# EAGLE board Slave Board (EAGLE 7.2.0)
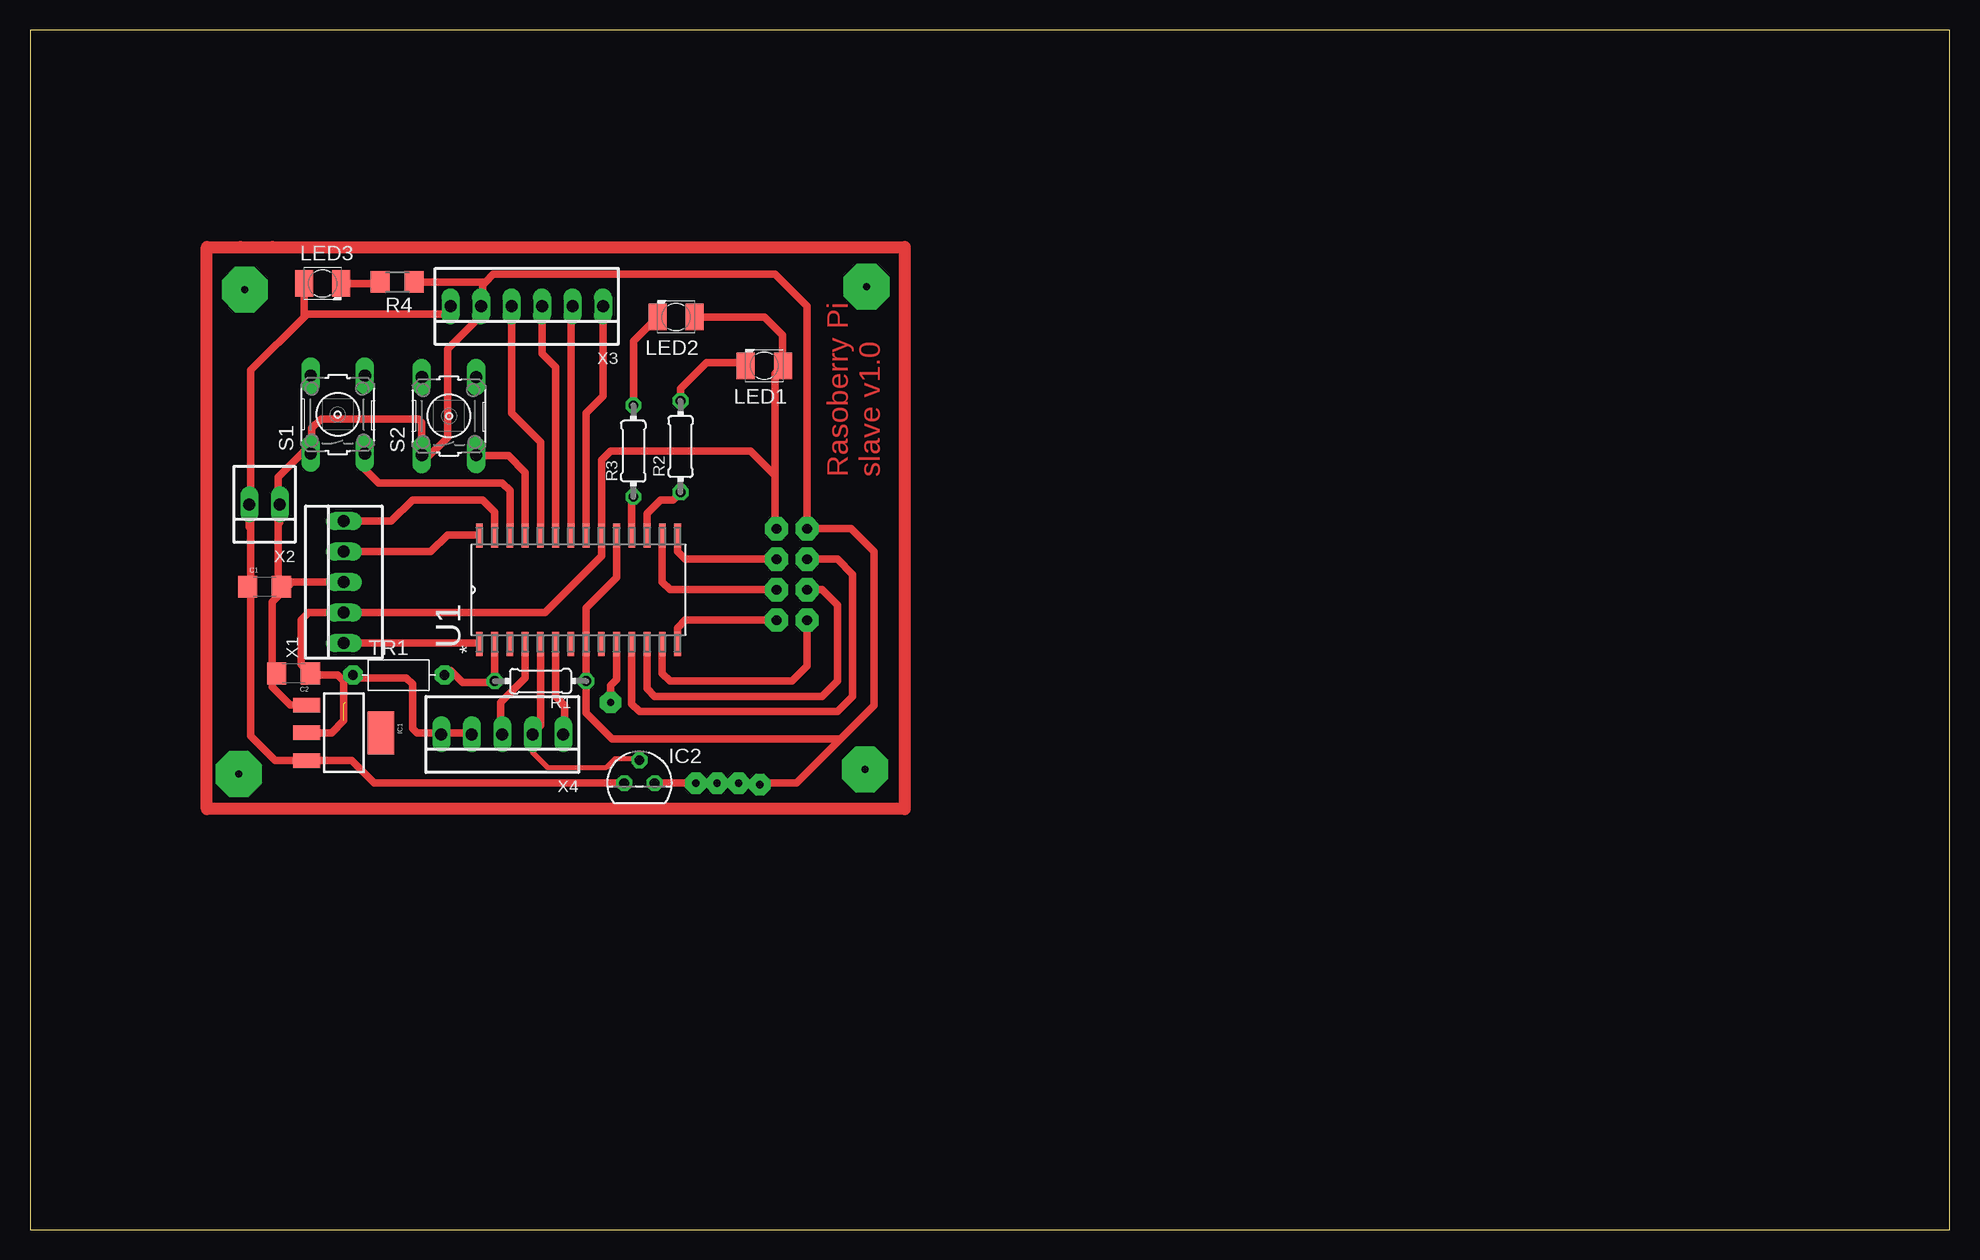
[diagram p0: board, top side]
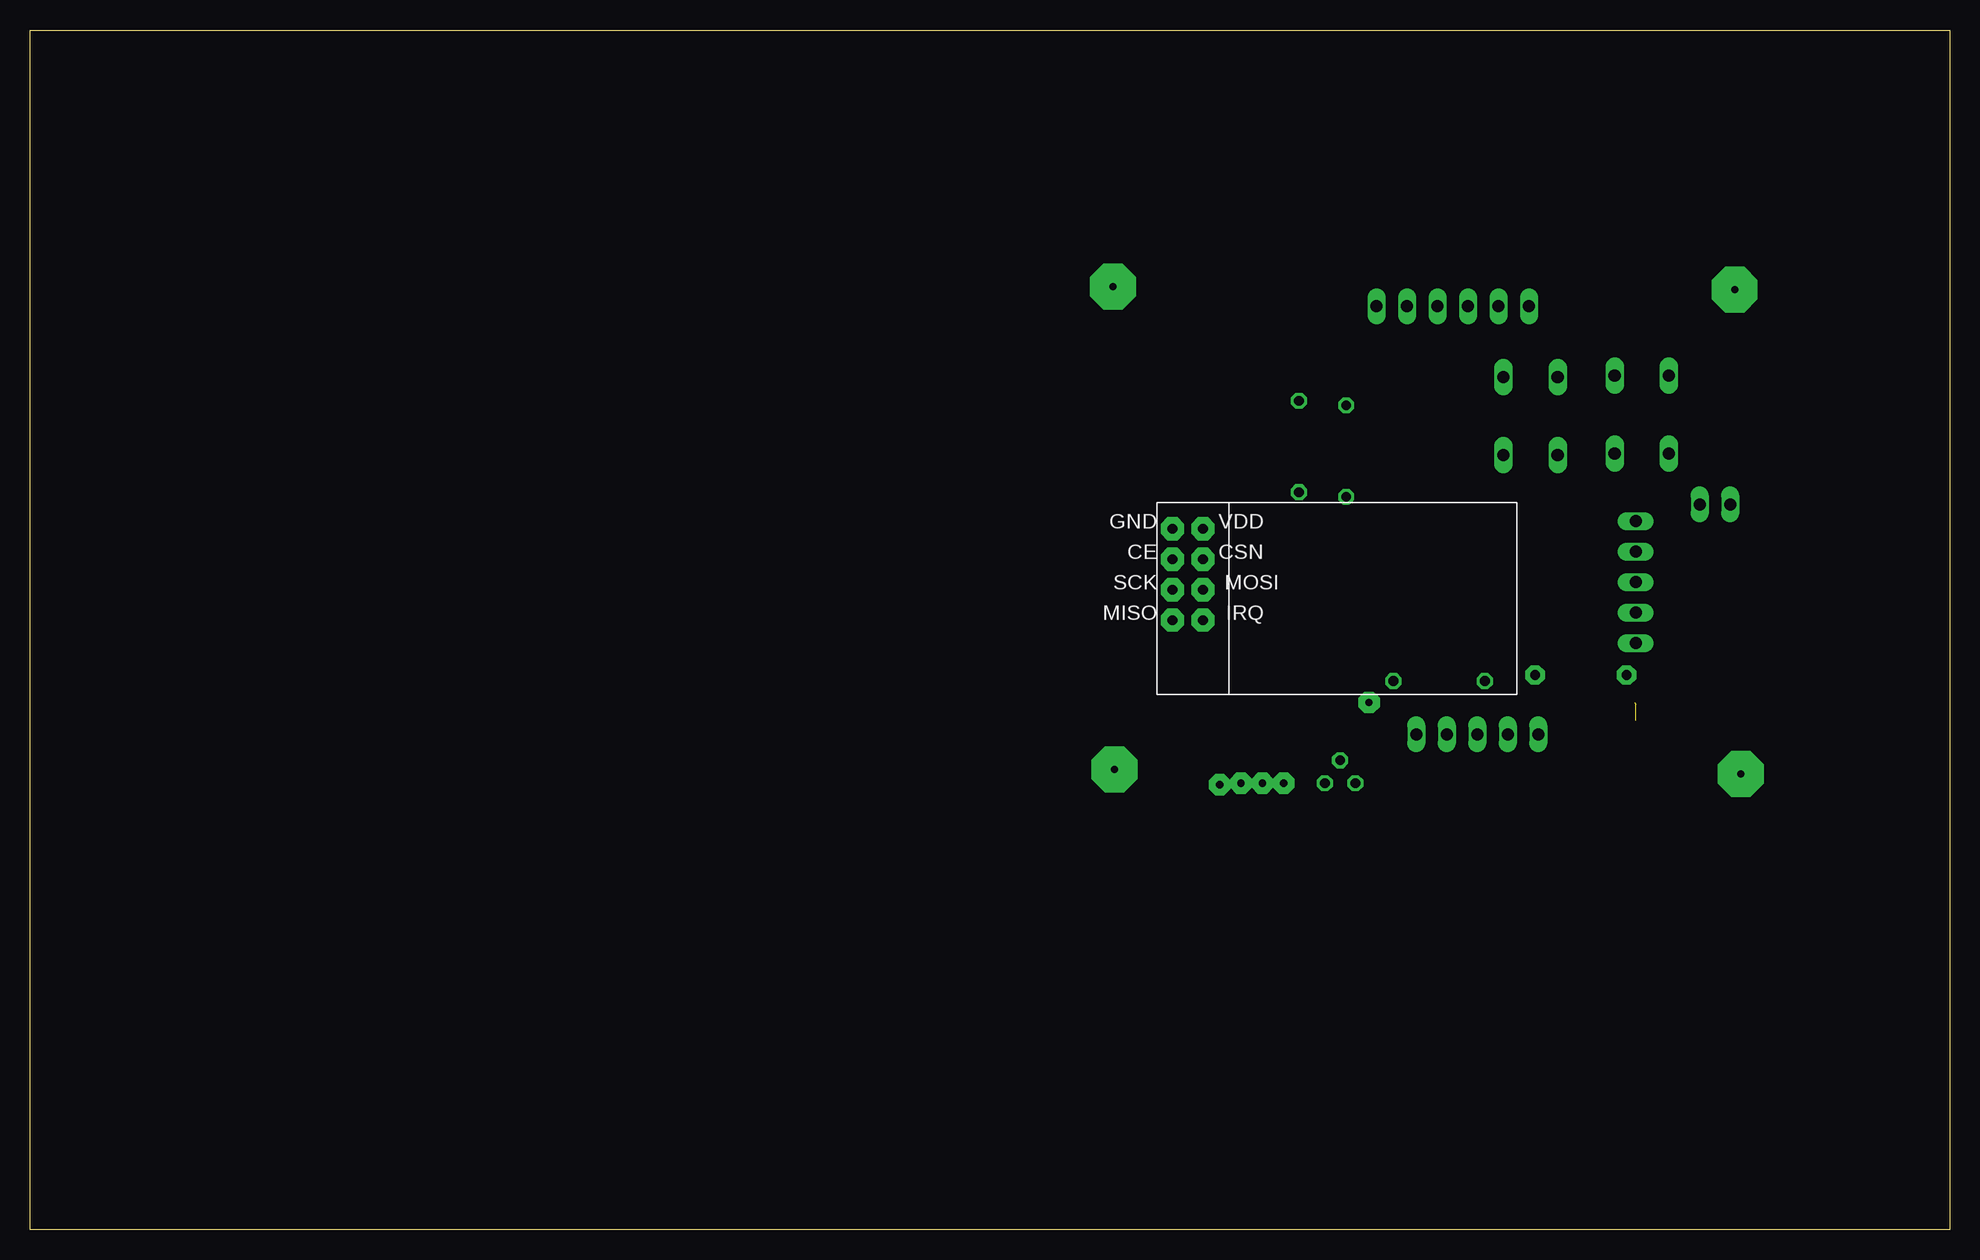
[diagram p1: board, bottom side, seen from below]

Size 160 x 100 mm. Coordinates in mm from the lower left corner, seen from the top.
Outline: 0,0 160,0 160,100 0,100 0,0
Copper layers (1*16): Top 0.035mm / dielectric 1.5mm / Bottom 0.035mm
Design rules "default": minimum track width 10mil, minimum drill 24mil, track to track 8mil, track to pad 8mil, pad to pad 8mil, via to via 8mil, smd to smd 8mil, copper to edge 40mil, drill to drill 8mil, minimum pad ring 10mil, minimum via ring 8mil, stop-mask expansion 4mil, vias tented up to drill 0mil, thermal gap 10mil

## Footprints (pad centres in the part's own frame; a part is rotated, then mirrored left to right if it is on the bottom)
1206 = smd 1.6 x 1.8: 1 -1.4,0; 2 1.4,0
SOT223 = smd 1.219 x 2.235: 1 -2.311,-3.099; 2 0,-3.099; 3 2.311,-3.099 | smd 3.6 x 2.2: 4 0,3.099
TO92 = drill 0.813 octagon: 1 -1.27,0; 2 0,1.905; 3 1.27,0
KA-3528ASYC = smd 1.5 x 2.2: A -1.55,0; C 1.55,0
0204/7 = drill 0.813 octagon: 1 -3.81,0; 2 3.81,0
R1206 = smd 1.6 x 1.803: 1 -1.422,0; 2 1.422,0
B3F-10XX = drill 1.016 long: 1 -3.251,2.261; 2 3.251,2.261; 3 -3.251,-2.261; 4 3.251,-2.261
R-7,5 = drill 0.813 pad 1.6 octagon: 1 -3.81,0; 2 3.81,0
SOIC127P1030X265-28N = smd 1.981 x 0.559: 1 -4.521,8.255; 2 -4.521,6.985; 3 -4.521,5.715; 4 -4.521,4.445; 5 -4.521,3.175; 6 -4.521,1.905; 7 -4.521,0.635; 8 -4.521,-0.635; 9 -4.521,-1.905; 10 -4.521,-3.175; 11 -4.521,-4.445; 12 -4.521,-5.715; 13 -4.521,-6.985; 14 -4.521,-8.255; 15 4.521,-8.255; 16 4.521,-6.985; 17 4.521,-5.715; 18 4.521,-4.445; 19 4.521,-3.175; 20 4.521,-1.905; 21 4.521,-0.635; 22 4.521,0.635; 23 4.521,1.905; 24 4.521,3.175; 25 4.521,4.445; 26 4.521,5.715; 27 4.521,6.985; 28 4.521,8.255
NRF24 = drill 0.8 pad 1.93 octagon: CE 12.7,-1.27; CSN 10.16,-1.27; GND 12.7,-3.81; IRQ 10.16,3.81; MISO 12.7,3.81; MOSI 10.16,1.27; SCK 12.7,1.27; VDD 10.16,-3.81
22-23-2051 = drill 1 long: 1 -5.08,0; 2 -2.54,0; 3 0,0; 4 2.54,0; 5 5.08,0
22-23-2021 = drill 1 long: 1 -1.27,0; 2 1.27,0
22-23-2061 = drill 1 long: 1 -6.35,0; 2 -3.81,0; 3 -1.27,0; 4 1.27,0; 5 3.81,0; 6 6.35,0

## Placement (x,y rotation side)
C1  [1206]  19.56,53.59 0 top
C2  [1206]  21.97,46.35 180 top
IC1  [SOT223]  26.16,41.4 270 top
IC2  LM35CZ  [TO92]  50.8,37.21 0 top
LED1  [KA-3528ASYC]  61.21,72.01 180 top
LED2  [KA-3528ASYC]  53.85,76.07 180 top
LED3  [KA-3528ASYC]  24.38,78.87 0 top
R1  [0204/7]  42.55,45.72 180 top
R2  [0204/7]  54.23,65.28 90 top
R3  [0204/7]  50.29,64.9 90 top
R4  [R1206]  30.61,78.99 180 top
S1  [B3F-10XX]  25.65,67.94 90 top
S2  [B3F-10XX]  34.92,67.82 90 top
TR1  [R-7,5]  30.73,46.23 0 top
U1  PIC18F24K20-E/SO  [SOIC127P1030X265-28N]  45.72,53.34 90 top
U$1  NRF24  [NRF24]  52.07,54.61 180 bottom
X1  22-23-2051  [22-23-2051]  26.16,53.98 90 top
X2  22-23-2021  [22-23-2021]  19.56,60.45 180 top
X3  [22-23-2061]  41.4,76.96 180 top
X4  22-23-2051  [22-23-2051]  39.37,41.27 180 top

## Library data of the parts
C1 C2 = SparkFun-Capacitors
IC1 = SparkFun-PowerIC
IC2 = lm35
LED1-LED3 = led
R1 = resistor
R2-R4 = eagle-ltspice; SPICEMODEL: NONE; SPICEPREFIX: R
S1 S2 = switch-omron; MPN: B3F-1000; OC_FARNELL: 176432; OC_NEWARK: 36M3542
TR1 = discrete
U1 = microchip pic18f24k20; MPN: PIC18F24K20-E/SO; OC_FARNELL: 1847751; OC_NEWARK: 88K5963; PACKAGE: SOIC-28; SUPPLIER: Microchip
U$1 = NRF
X1 X4 = con-molex; MF: MOLEX; MPN: 22-23-2051; OC_FARNELL: 1462952; OC_NEWARK: 38C9178
X2 = con-molex; MF: MOLEX; MPN: 22-23-2021; OC_FARNELL: 1462926; OC_NEWARK: 25C3832
X3 = con-molex; MF: MOLEX; MPN: 22-23-2061; OC_FARNELL: 1462922; OC_NEWARK: 27C1933

## Nets
CE: U1.11 U$1.CE
CSN: U1.15 U$1.CSN
GND: C1.2 C2.2 IC1.1 IC2.3 R1.1 R4.1 S1.1 S2.1 U1.8 U1.19 U$1.GND X1.3 X2.1 X3.5
IRQ: U1.14 U$1.IRQ
LDR: R1.2 TR1.2 U1.2
LED1: R2.1 U1.17
LED2: R3.1 U1.18
MISO: U1.13 U$1.MISO
MOSI: U1.16 U$1.MOSI
N$3: U1.1 X1.1
N$4: LED1.C R2.2
N$5: LED2.C R3.2
N$10: LED3.C R4.2
PGC: U1.27 X1.5
PGD: U1.28 X1.4
R1: U1.24 X3.4
R2: U1.23 X3.3
R3: U1.22 X3.2
R4: U1.21 X3.1
SCK: U1.12 U$1.SCK
SW1: S1.3 U1.26
SW2: S2.3 U1.25
TMP: IC2.2 U1.5
VDD: C2.1 IC1.2 LED1.A LED2.A TR1.1 U1.20 U$1.VDD X1.2
VIN: C1.1 IC1.3 IC2.1 LED3.A X2.2 X3.6

## Tracks (layer width: path | path; a pad name or v marks a point on that pad's centre or on a via)
CE
  Top 0.61: U1.11 50.16,43.81 50.8,43.18 67.31,43.18 68.58,44.45 68.58,54.61 67.31,55.88 U$1.CE
CSN
  Top 0.61: U1.15 53.98,56.52 54.61,55.88 U$1.CSN
GND  (via drill 0.6 pad 1.78)
  Top 0.61: U1.19 48.9,54.36 46.35,51.82 U1.8 R1.1 46.35,43.05 48.51,40.89 67.56,40.89 | 67.56,40.89 70.36,43.69 70.36,56.52 68.45,58.42 U$1.GND 64.77,76.96 62.1,79.63 38.61,79.63 37.97,78.99 | 23.5,65.53 23.5,64.8 S1.1 | IC1.1 21.69,43.71 20.19,45.21 20.19,46.61 | 20.19,46.61 20.19,52.32 20.7,52.83 | 20.7,52.83 21.84,53.98 X1.3 | 23.5,65.53 23.5,66.8 24.26,67.56 32.38,67.56 32.66,67.28 S2.1 32.89,64.34 32.89,64.14 34.8,66.04 34.8,73.41 37.59,76.2 | 23.5,65.53 20.7,62.74 20.7,58.8 | 20.7,58.8 20.7,53.47 | 20.7,53.47 20.7,52.83 | C2.2 20.45,46.35 20.19,46.61 | X3.5 37.59,76.2 | 37.59,76.2 37.72,76.33 37.72,78.74 37.97,78.99 | X2.1 20.83,58.93 20.7,58.8 | C1.2 20.83,53.59 20.7,53.47 | R4.1 37.97,78.99 | 67.56,40.89 65.53,38.86 65.28,38.61 63.88,37.21 v59.05,37.21 v57.28,37.21 v55.5,37.21 IC2.3
IRQ
  Top 0.61: U1.14 53.98,50.16 54.61,50.8 U$1.IRQ
LDR
  Top 0.61: TR1.2 34.54,46.61 35.05,46.61 36.07,45.59 38.61,45.59 R1.2 U1.2
LED1
  Top 0.61: U1.17 51.44,59.69 52.58,60.83 53.59,60.83 R2.1
LED2
  Top 0.61: U1.18 50.16,60.96 R3.1
MISO
  Top 0.61: U1.13 52.7,46.35 53.34,45.72 63.5,45.72 64.77,46.99 U$1.MISO
MOSI
  Top 0.61: U1.16 52.7,53.98 53.34,53.34 U$1.MOSI
N$1
  Top 0.61: 42.55,48.64 42.55,42.04 41.91,41.4
N$2
  Top 0.61: 41.27,48.64 41.27,45.97 39.24,43.94 39.24,41.27 39.37,41.15
N$3
  Top 0.61: X1.1 37.39,48.9 U1.1
N$4
  Top 0.61: R2.2 54.23,70.1 56.39,72.26 59.41,72.26 LED1.C
N$5
  Top 0.61: R3.2 50.29,74.07 LED2.C
N$6
  Top 0.61: 36.96,41.4 34.16,41.4
N$7
  Top 0.61: 26.92,45.97 31.37,45.97 31.88,45.47 31.88,41.78 32.26,41.4 33.78,41.4 33.91,41.27
N$8  (via drill 0.6 pad 1.78)
  other vias: 60.83,37.08
N$9  (via drill 0.6 pad 1.78)
  Top 0.61: v48.39,43.94 48.39,45.34 48.9,45.85 48.9,49.02
N$10
  Top 0.61: LED3.C 29.06,78.87 R4.2
N$12
  Top 1.016: 17.53,81.92 20.19,81.92 72.9,81.92 72.9,35.05 14.73,35.05 14.73,81.92 17.53,81.92
N$13  (via drill 0.6 pad 3.81)
  other vias: 17.91,78.36
N$14  (via drill 0.6 pad 3.81)
  other vias: 69.72,78.61
N$15  (via drill 0.6 pad 3.81)
  other vias: 17.4,37.97
N$16  (via drill 0.6 pad 3.81)
  other vias: 69.6,38.35
PGC
  Top 0.61: X1.5 30.1,59.05 31.88,60.83 37.72,60.83 38.73,59.82 U1.27
PGD
  Top 0.61: X1.4 33.4,56.52 34.8,57.91 37.41,57.91 U1.28
R1
  Top 0.61: X3.4 40.13,68.07 42.55,65.66 U1.24
R2
  Top 0.61: U1.23 43.81,71.88 42.67,73.03 X3.3
R3
  Top 0.61: U1.22 45.09,76.83 X3.2
R4
  Top 0.61: U1.21 46.35,68.07 47.75,69.47 X3.1
S$1
  Top 0.61: 43.81,48.77 43.81,44.45 44.58,43.69 44.58,41.53 44.45,41.4
SCK
  Top 0.61: U1.12 51.44,45.09 52.07,44.45 66.04,44.45 67.31,45.72 67.31,52.07 66.04,53.34 U$1.SCK
SW1
  Top 0.61: S1.3 27.91,63.4 29.08,62.23 39.37,62.23 40.01,61.59 U1.26
SW2
  Top 0.61: U1.25 41.27,63.12 39.88,64.52 37.24,64.52 S2.3
TMP
  Top 0.406: 50.67,39.24 48.77,39.24 48.01,38.48 43.18,38.48 41.91,39.75 41.91,41.27 42.04,41.4 42.04,41.66 42.55,42.16 U1.5
  Top 0.61: 50.67,39.24 IC2.2
VDD  (2 unrouted)
  Top 0.61: IC1.2 25.15,41.4 26.16,42.42 26.16,45.72 | 26.16,45.72 25.65,46.23 23.5,46.23 C2.1 | C2.1 | C2.1 22.61,47.12 22.61,50.8 23.24,51.44 X1.2 42.93,51.44 47.62,56.13 U1.20 47.62,64.14 48.39,64.9 60.07,64.9 62.1,62.87 | 62.1,62.87 62.1,58.55 U$1.VDD | LED2.A 61.21,76.07 62.74,74.55 62.74,72.03 LED1.A 62.1,71.35 62.1,62.87 | TR1.1 26.67,46.23 26.16,45.72
VIN
  Top 0.61: 18.41,53.09 18.41,58.42 | 18.41,58.42 18.41,71.63 22.83,76.05 | 22.83,76.05 23.11,76.33 34.42,76.33 X3.6 | X2.2 18.29,58.55 18.41,58.42 | C1.1 18.16,53.34 18.41,53.09 | 18.41,53.09 18.41,41.15 20.45,39.12 23.04,39.12 IC1.3 26.82,39.09 28.7,37.21 IC2.1 | LED3.A 22.83,76.05

## Text on the board
Top: Rasoberry Pi / slave v1.0